# Altium PCB PCB1.PcbDoc
Units mm, origin at the board's own origin, x right, y up, seen from the top; angles counter-clockwise.
Board outline 61.29 x 63.12 mm, 2 copper layers (Top Layer, Bottom Layer); 38 components, 44 nets, 154 pads, 34 vias.
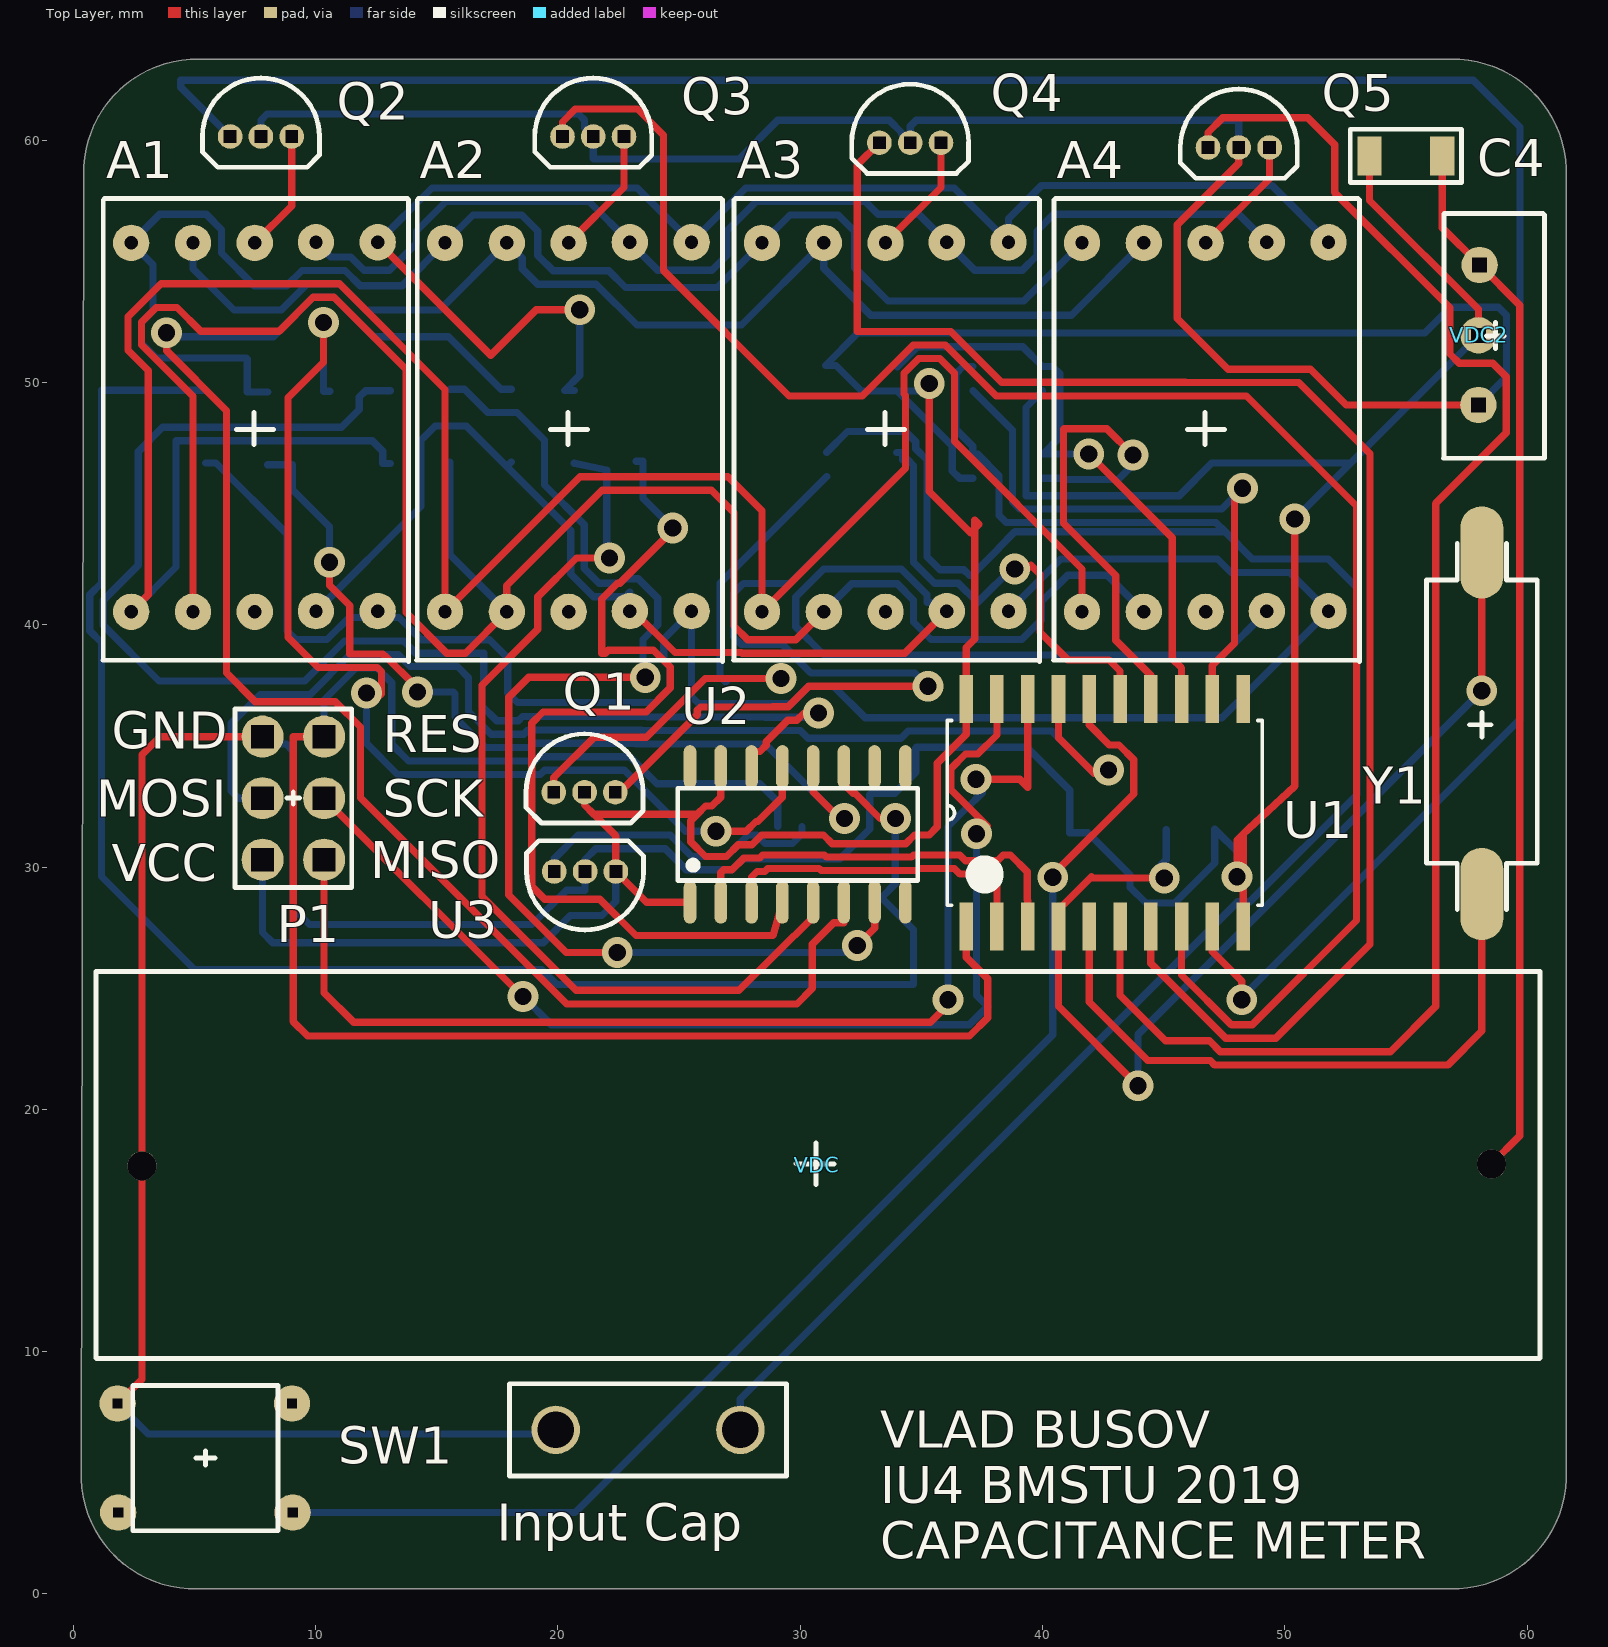
[diagram p0: Top Layer view]
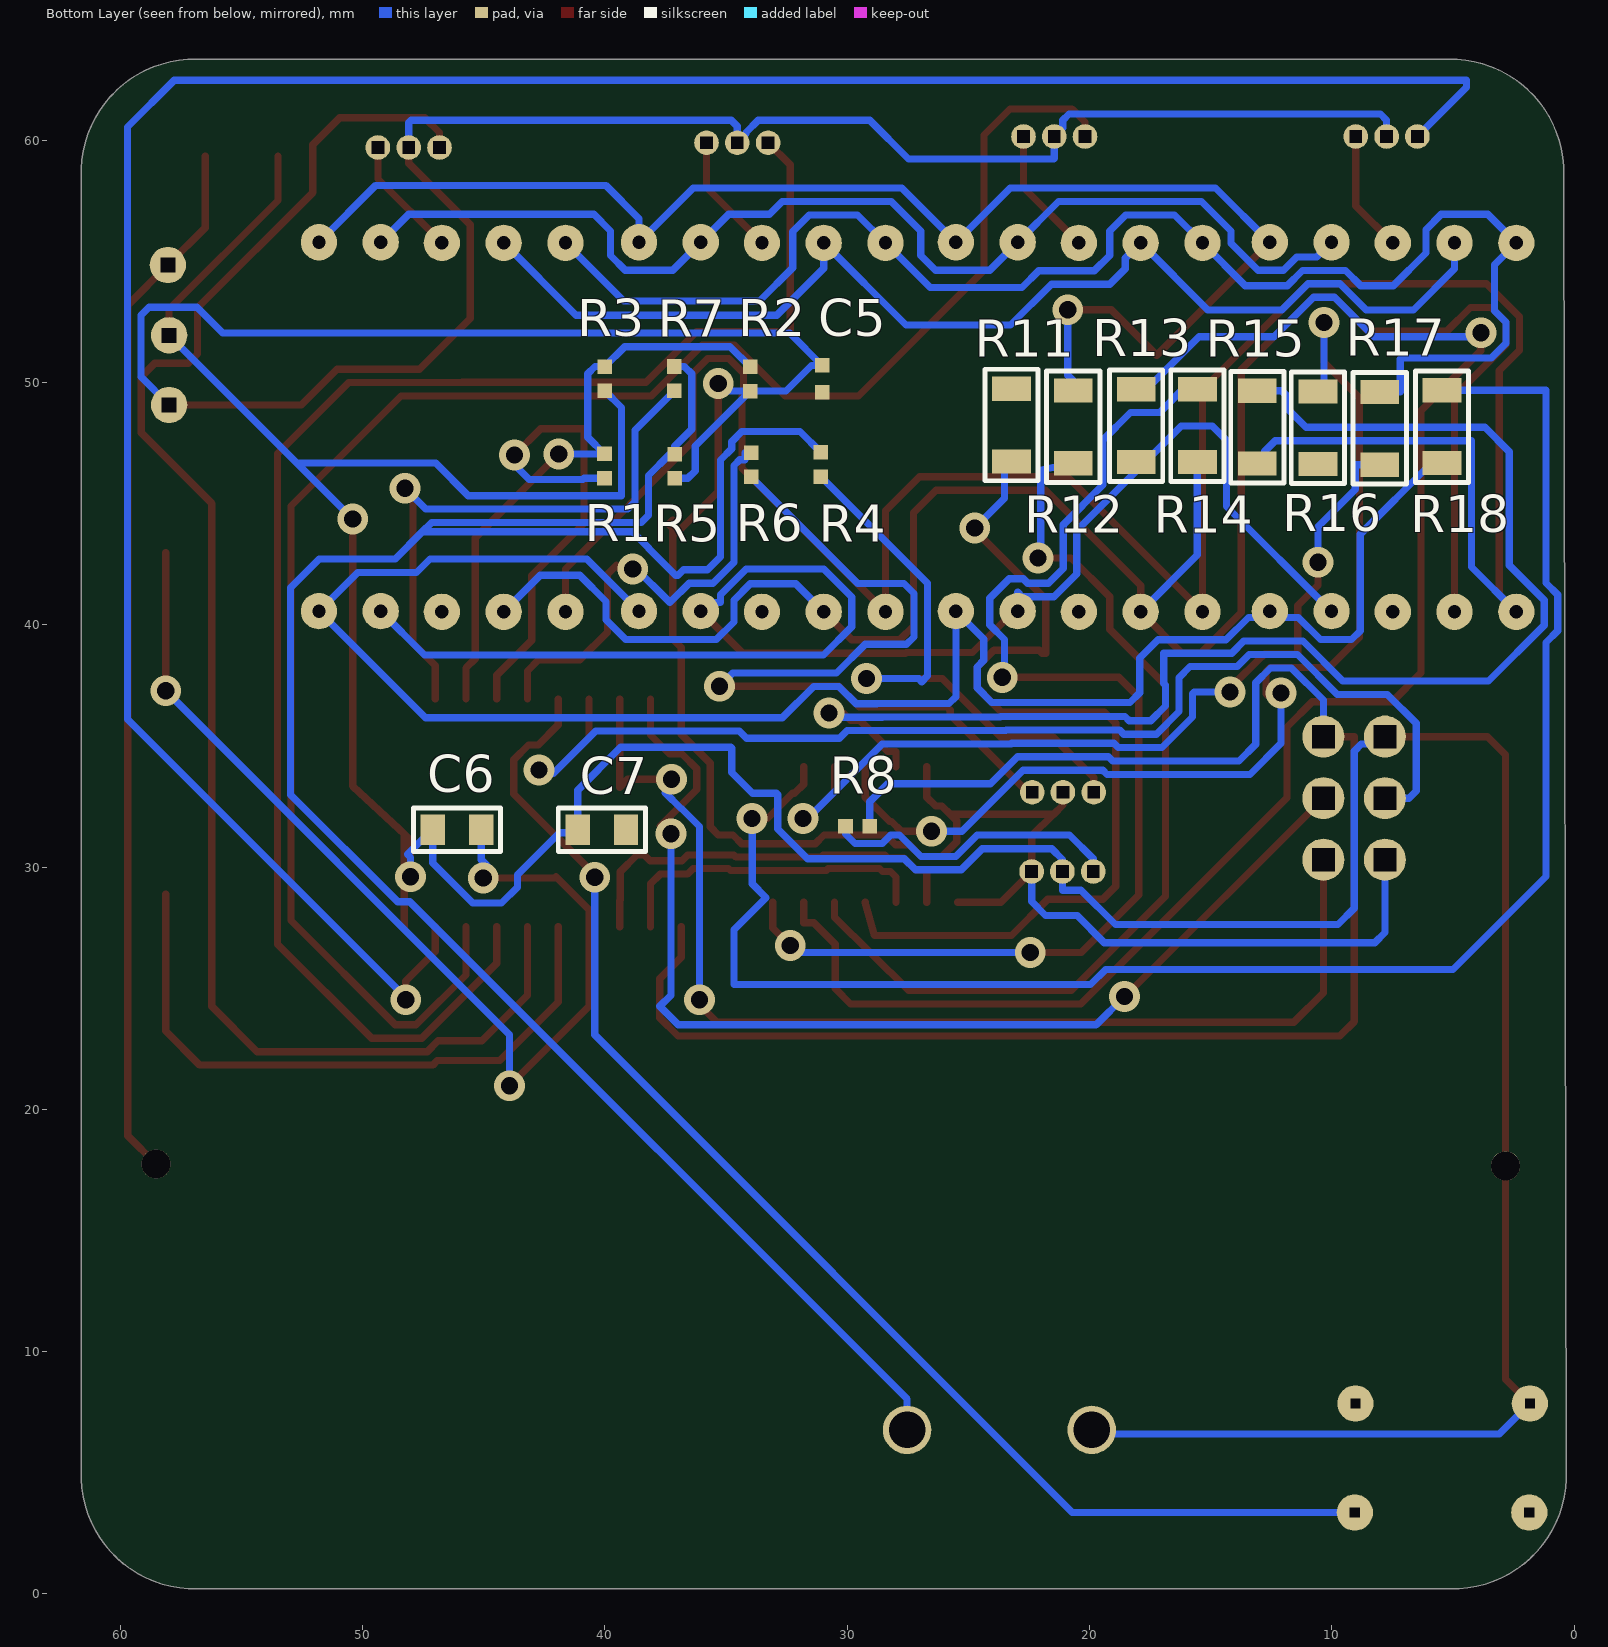
[diagram p1: Bottom Layer view, seen from below]
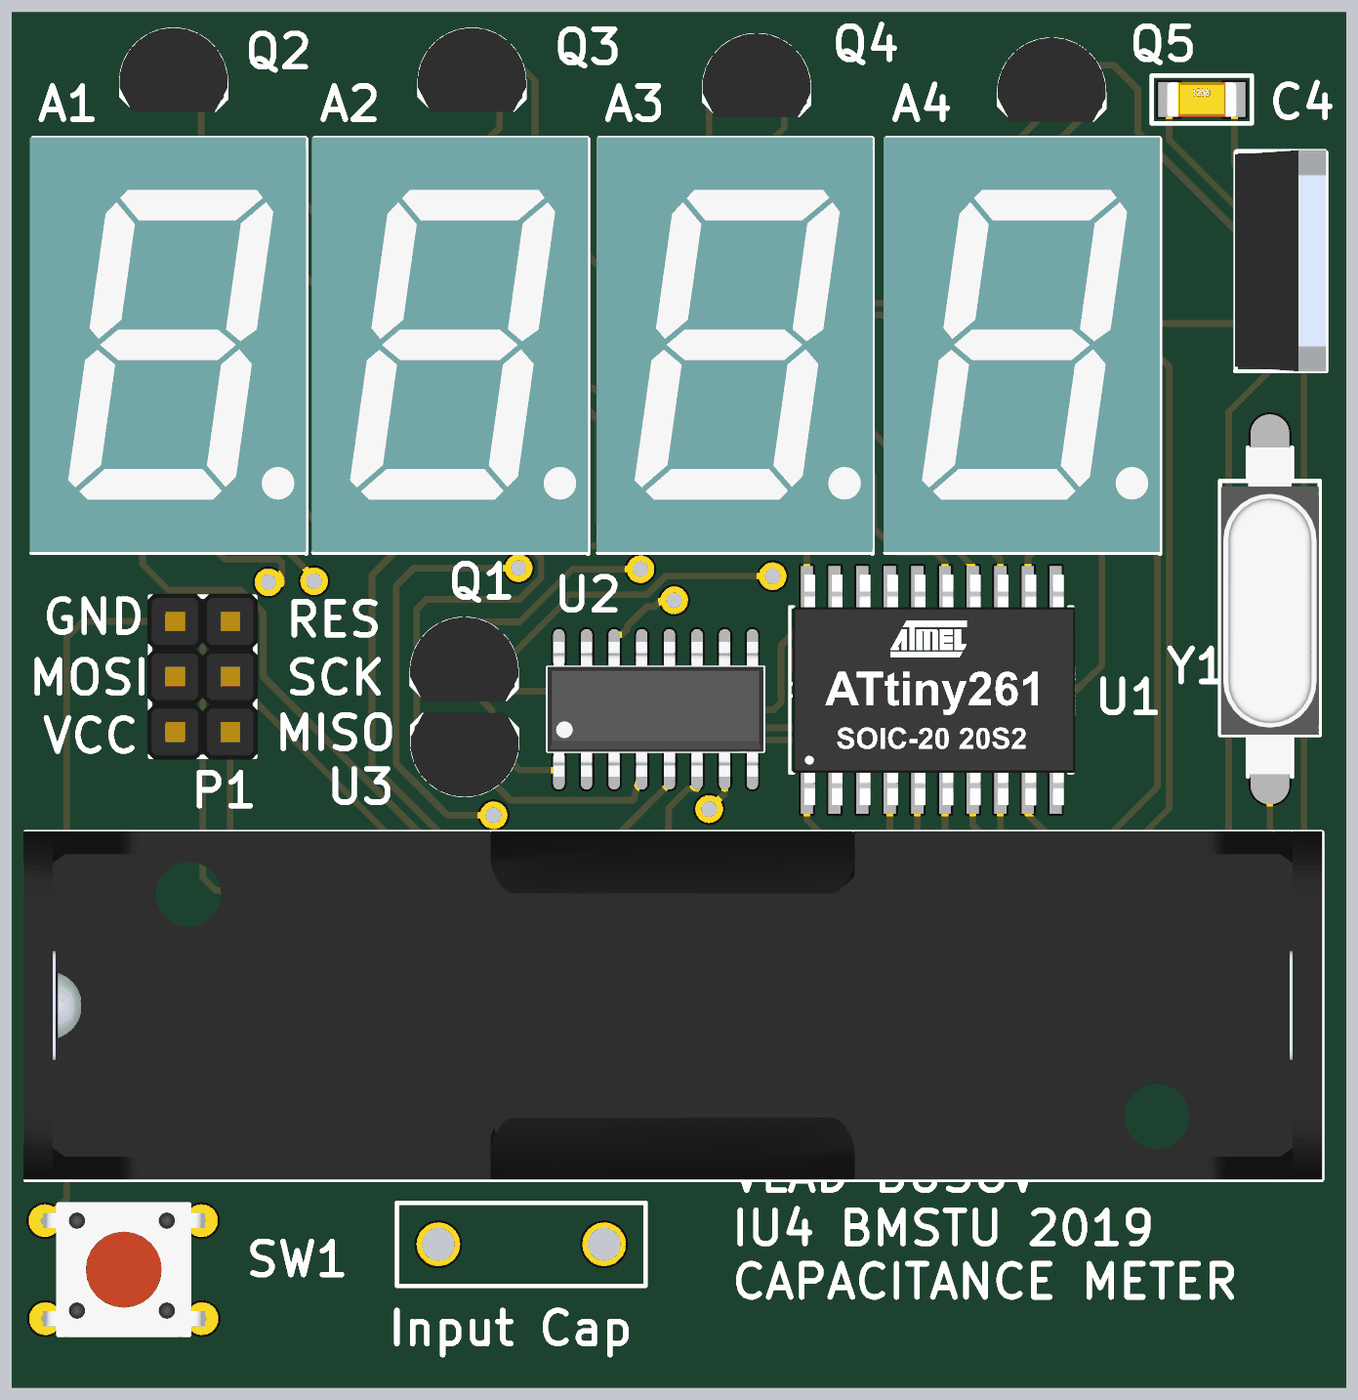
[diagram p2: 3D render of the assembled board from above, using the file's embedded part models]
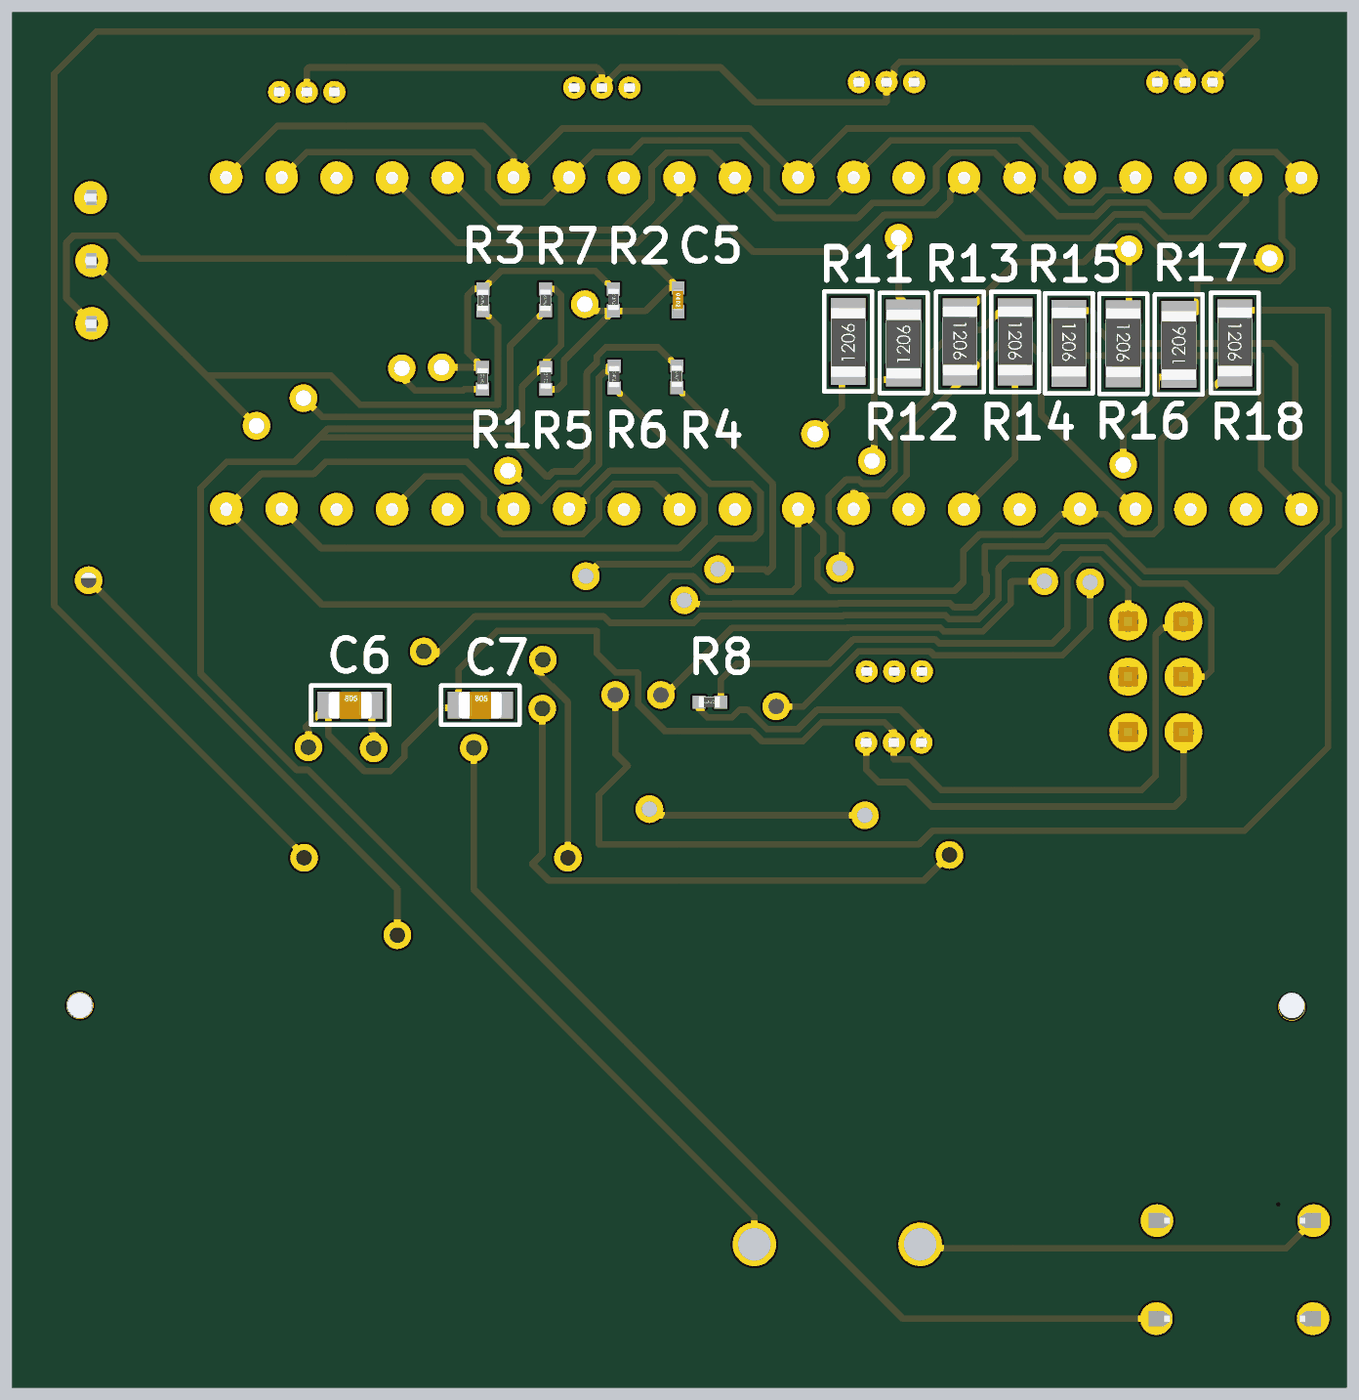
[diagram p3: 3D render of the assembled board from below, using the file's embedded part models]

## Layer stack, top to bottom
Top Solder: solder mask 0.0102, Solder Resist, Dk 3.5
Top Layer: signal copper 0.0356
Dielectric 1: dielectric 0.32, FR-4, Dk 4.8
Bottom Layer: signal copper 0.0356
Bottom Solder: solder mask 0.0102, Solder Resist, Dk 3.5

## Board outline
0.328,4.741 cw(c0.427,4.758) 0.327,4.758 0.429,58.777 cw(c0.527,58.792) 0.428,58.795 cw(c5.099,58.665) 0.429,58.832 0.429,58.9 cw(c0.529,58.9) 0.433,58.929 cw(c5.099,58.665) 5.195,63.337 cw(c5.2,63.237) 5.2,63.337 56.854,63.337 cw(c56.942,58.665) 61.613,58.818 cw(c61.514,58.8) 61.614,58.8 61.614,4.758 cw(c61.514,4.758) 61.613,4.741 cw(c56.942,4.885) 56.826,0.213 cw(c56.815,0.313) 56.815,0.213 5.126,0.213 cw(c5.126,0.313) 5.115,0.213 cw(c4.999,4.885)

## Design rules (kind name [scope] priority, off if disabled: settings)
Clearance [All] p1: gap=0.254 ignorepadtopadclearanceinfootprint=FALSE except(0: Arc-Hole Track-Hole SMDPad-Hole THPad-Hole Via-Hole Fill-Hole Poly-Hole Region-Hole Text-Hole)
PolygonConnect [All] p1: connectstyle=Relief reliefconductorwidth=0.254 reliefentries=4 polygonreliefangle="90 Angle" airgapwidth=0.254
RoutingVias [All] p1: holewidth=0.711 width=1.27 viastyle="Through Hole" minholewidth=0.711 minwidth=1.27 maxholewidth=0.711 maxwidth=1.27
SolderMaskExpansion [All] p1: expansion=0.102
Width [All] p1: maxlimit=0.3 minlimit=0.254 preferedwidth=0.3
30 further rules are at their usual default settings.

## Components (designator, comment, footprint, x,y, rotation, side; value= is the part's Value field where it differs from the comment)
A1 "7segment" 7segment 7.487,48.084 r0 top
A2 "7segment" 7segment 20.441,48.084 r0 top
A3 "7segment" 7segment 33.522,48.084 r0 top
A4 "7segment" 7segment 46.73,48.084 r0 top
C4 "0.33мкФ" CH1206C 54.998,59.348 r0 top
C5 "0.1мкФ" CH0402C 31.039,50.149 r270 bottom
C6 "33p" CH0805C 46.108,31.537 r180 bottom
C7 "33p" CH0805C 40.127,31.537 r180 bottom
"Input Cap" "Cap" RAD-0.3 23.72,6.771 r180 top value=megure (schematic designator Cvar)
P1 "CN6BOX" CN6BOX 9.079,32.841 r0 top
Q1 "A1048" PST600C 21.099,33.593 r0 top
Q2 "rn2205" PST600C 7.741,60.657 r0 top
Q3 "RN2205" PST600C 21.457,60.657 r0 top
Q4 "rn2205" PST600C 34.538,60.403 r0 top
Q5 "rn2205" PST600C 48.1,60.203 r0 top
R1 "10кОм" CH0402R 40.019,46.549 r90 bottom
R2 "39кОм" CH0402R 34.006,50.144 r270 bottom
R3 "39кОм" CH0402R 40.003,50.154 r90 bottom
R4 "3,3кОм" CH0402R 31.096,46.616 r270 bottom
R5 "3.3МОм" CH0402R 37.116,46.54 r270 bottom
R6 "10кОм" CH0402R 33.972,46.603 r270 bottom
R7 "100" CH0402R 37.132,50.157 r90 bottom
R8 "1.5кОм" CH0402R 29.572,31.676 r180 bottom
R11 "680" CH1206R 23.221,48.241 r90 bottom
R12 "680" CH1206R 20.673,48.166 r90 bottom
R13 "680" CH1206R 18.077,48.217 r270 bottom
R14 "680" CH1206R 15.55,48.217 r270 bottom
R15 "680" CH1206R 13.075,48.155 r270 bottom
R16 "680" CH1206R 10.577,48.13 r270 bottom
R17 "680" CH1206R 8.023,48.103 r90 bottom
R18 "680" CH1206R 5.454,48.172 r270 bottom
SW1 "Switch" SWITCH 5.452,5.608 r0 top
U1 "AT90S2313" AT90S2313 42.183,32.234 r90 top
U2 "HC4049" HC4049 29.896,31.472 r90 top
U3 "PST600C" PST600C 21.121,29.307 r180 top
VDC "BatteryAA" Battery 30.68,17.743 r180 top
VDC2 "L7805ABV" 7805 58.689,51.945 r270 top
Y1 "HC49S" HC49S 58.131,35.871 r90 top

## Footprints (in the part's own frame and the unit in brackets; to place one, negate y for a bottom-side part, rotate by r counter-clockwise, add the part's x,y. Pads: shape width x height; smd on the part's side, far side on the other; paste and mask are expansions set on the pad)
7segment [mm]
  round 1.5 hole 0.55: 1(-5.1,-7.55) 2(-2.55,-7.55) 3(0,-7.55) 4(2.525,-7.525) 5(5.075,-7.525) 6(5.075,7.7) 7(2.525,7.7) 8(0,7.675) 9(-2.55,7.675) 10(-5.1,7.675)
  silkscreen extent -6.28,-9.6 6.35,9.5, body extent -6.35,-9.52 6.35,9.53, height 8.1
7805 [mm]
  round 1.5 hole 0.6 square: 1(-2.9,-0.65) 2(0,-0.7) 3(2.875,-0.7)
  silkscreen extent -5.03,-2.15 5.07,2.03, body extent -5.08,-2.17 5.08,2.03, height 21.95
AT90S2313 [mil]
  rect 78x22 smd: 1(185,160) 2(185,110) 3(185,60) 4(185,10) 5(185,-40) 6(185,-90) 7(185,-140) 8(185,-190) 9(185,-240) 10(-185,-190) 11(-185,-140) 12(-185,-90) 13(-185,-40) 14(-185,110) 15(-185,160) 16(185,210) 17(-185,210) 18(-185,10) 19(-185,60) 20(-185,-240)
  silkscreen extent -150,-271 150,241, body extent -209,-276 209,236, height 105
Battery [mm]
  round 1.2 hole 1.2: 1(-27.85,0) 2(27.85,0.075)
  silkscreen extent -29.85,-7.95 29.75,8.02, body extent -29.85,-8 29.85,8, height 13.9
CH0402C [mm]
  rect 0.6x0.6 smd: 1(-0.55,0) 2(0.55,0)
  body extent -0.51,-0.25 0.51,0.25, height 0.51
CH0402R [mm]
  rect 0.6x0.6 smd: 1(-0.5,0) 2(0.5,0)
  body extent -0.52,-0.25 0.48,0.25, height 0.34
CH0805C [mm] "Chip Capacitor, 2-Leads, Body 2,00x1,20mm, IPC Medium Density"
  rect 1x1.25 smd: 1(-1,0) 2(1,0)
  silkscreen extent -1.8,-0.9 1.8,0.9, body extent -1,-0.62 1,0.63, height 0.78
CH1206C [mm] "Non polar chip capacitor, size 1206"
  rect 1x1.6 smd: 1(-1.5,0) 2(1.5,0)
  silkscreen extent -2.3,-1.1 2.3,1.1, body extent -1.6,-0.8 1.6,0.8, height 1
CH1206R [mm] "Chip Resistor, 2-Leads, Body 3,0x1,5mm, IPC Low Density"
  rect 1x1.6 smd: 1(-1.5,0) 2(1.5,0)
  silkscreen extent -2.3,-1.1 2.3,1.1, body extent -1.65,-0.8 1.55,0.8, height 0.47
CN6BOX [mil]
  oval 68.06x68.48 hole 37 square: 1(50,-100) 2(-50,-100) 3(50,0) 4(-50,0) 5(50,100) 6(-50,100)
  silkscreen extent -95,-145 95,145, body extent -100,-150 100,150, height 333
HC49S [mil]
  oval 150x70 smd: 1(-275,0) 2(280,0)
  silkscreen extent -300,-90 295,90, body extent -295,-89 295,89, height 201
HC4049 [mil]
  oval 70.06x20.48 smd: 1(-115,25) 2(-115,-25) 3(-115,-75) 4(-115,-125) 5(105,75) 6(105,25) 7(105,-25) 8(105,-75) 9(-115,125) 10(-115,75) 11(105,125) 12(-115,175) 13(105,-175) 14(105,-125) 15(105,175) 16(-115,-175)
  silkscreen extent -80,-195 70,195, body extent -127,-195 117,195, height 67
PST600C [mil]
  round 40 hole 20 square: 1(-50,-20) 2(0,-20) 3(50,-20)
  silkscreen extent -95,-70 95,75, body extent -98,-74 98,78, height 335
RAD-0.3 [mm] "Radial Cap, Thru-Hole; 2 Leads; 0.3 in Pin Spacing"
  round 2 hole 1.5: 1(-3.81,0) 2(3.81,0)
  silkscreen extent -5.71,-1.91 5.72,1.9
SWITCH [mm]
  round 1.5 hole 0.4 square: 1(-3.625,2.25) 2(3.6,-2.25) ""(-3.6,-2.25) ""(3.575,2.25)
  oval 1.5x0 all layers, no hole: 8(-2,3)
  silkscreen extent -3,-3 3,3, body extent -3.95,-3.1 3.95,3.1, height 7.6

## Part data
C4 C5 C6 C7: library part Capacitor
"Input Cap": "Capacitor", LatestRevisionDate=17-Jul-2002, LatestRevisionNote="Re-released for DXP Platform.", PackageDescription="Radial Cap, Thru-Hole; 2 Leads; 0.3 in Pin Spacing", PackageReference=RAD-0.3, Published=8-Jun-2000, Publisher="Altium Limited"
Q3: library part rn2205, "rn2205"
R1 R2 R3 R4 R5 R6 R7 R8 R11 R12 R13 R14 R15 R16 R17 R18: library part Resistor
VDC2: library part 7805, "7805"

## Via types
v1: diameter 1.27, hole 0.711, Top Layer to Bottom Layer, 34 vias

## Nets (pads, with @x,y where several pads share a name; then routed paths per layer and width w, separated by ;. In a path a pad name is that pad's centre, name@x,y a point inside that pad or via, vN(x,y) a via of type N, cw(c..) or ccw(c..) an arc to the next point about the centre after c; other vN are vias at no path point)
GND: "Input Cap.2" C4.1 C6.1 C7.1 P1.6 R3.1 SW1.1 U1.20 U3.2 VDC2.2 VDC.2 | length 170.3
  Top Layer w0.3: SW1.1 2.83,8.861 VDC.2 2.83,34.636 3.575,35.381 P1.6 ; v1(48.025,29.6) 48.025,31.106 48.279,31.36 ; U1.20 48.279,31.36 ; v1(50.409,44.365) 50.409,33.342 48.489,31.556 48.279,31.36 ; C4.1 53.498,57.507 57.989,53.016 VDC2.2
  Bottom Layer w0.3: SW1.1 3.09,6.595 19.734,6.595 19.91,6.771 ; P1.6 7.809,35.076 8.782,35.076 9.079,34.779 9.079,28.294 9.747,27.626 18.933,27.626 20.35,29.043 21.121,29.043 U3.2 21.121,30.313 21.558,30.75 24.426,30.75 25.295,29.882 27.185,29.882 27.647,30.344 31.638,30.344 32.866,31.571 32.866,32.985 32.921,33.041 33.907,33.041 34.769,33.902 34.769,34.916 34.794,34.941 39.356,34.941 41.127,33.171 C7.1 41.127,31.411 41.878,31.411 43.611,29.678 43.611,29.17 44.27,28.511 45.455,28.511 47.108,30.164 C6.1 47.108,31.563 48.15,30.521 48.025,30.396 v1(48.025,29.6) ; R3.1 39.315,48.966 39.315,45.328 45.641,45.328 46.987,46.674 52.718,46.674 ; v1(50.409,44.365) 52.718,46.674 ; VDC2.2 52.718,46.674
NetA1_1: A1.1 A2.1 A3.1 A4.1 R15.2 | length 101.9
  Top Layer w0.3: A1.1 3.092,41.239 3.092,50.494 2.257,51.329 2.257,52.71 3.615,54.068 10.985,54.068 15.341,49.712 A2.1 20.909,46.102 27.018,46.102 28.422,44.698 A3.1 34.346,46.458 34.346,49.46 34.286,49.52 34.286,50.38 34.895,50.989 35.755,50.989 36.364,50.38 36.364,47.568 41.63,42.302 A4.1
  Bottom Layer w0.3: A1.1 4.235,42.382 4.235,47.591 12.338,47.591 12.77,47.159 12.77,46.655 R15.2
NetA1_2: A1.2 A2.2 A3.2 A4.2 R14.2 | length 87.9
  Top Layer w0.3: A1.2 4.937,49.433 2.811,51.559 2.811,52.48 3.42,53.089 4.28,53.089 5.258,52.112 8.492,52.112 9.895,53.514 10.755,53.514 13.735,50.534 13.735,40.504 15.411,38.828 16.185,38.828 A2.2 17.891,41.617 21.822,45.548 26.34,45.548 27.268,44.621 27.268,39.944 27.832,39.38 29.818,39.38 A3.2
  Bottom Layer w0.3: R14.2 15.55,42.875 A2.2 ; A3.2 32.126,41.688 34,41.688 34.676,41.012 34.676,40.112 35.401,39.386 39.141,39.386 39.961,40.206 39.961,40.96 41.04,42.039 42.675,42.039 A4.2
NetA1_4: A1.4 A2.4 A3.4 A4.4 R13.2 | length 67.1
  Top Layer w0.3: A2.4 23.122,40.559 24.83,38.851 27.576,38.851 27.601,38.826 34.314,38.826 A3.4
  Bottom Layer w0.3: A1.4 10.028,40.559 14.345,44.875 14.345,47.616 14.934,48.205 16.219,48.205 R13.2@17.892,46.532 ; R13.2 R13.2@17.892,46.532 ; A2.4 22.966,41.339 22.786,41.159 21.466,41.159 20.533,42.092 20.533,43.891 R13.2@17.892,46.532 ; A3.4 36.047,40.921 35.23,40.921 35.23,41.241 34.17,42.302 30.976,42.302 29.818,41.144 29.818,39.915 30.982,38.751 47.447,38.751 A4.4
NetA1_5: A1.5 A2.5 A3.5 A4.5 R18.2 | length 79
  Bottom Layer w0.3: R18.2 5.89,46.672 8.833,43.73 8.833,39.742 9.188,39.386 10.471,39.386 11.386,40.301 12.304,40.301 A1.5 12.82,40.301 13.444,40.301 14.365,39.38 17.173,39.38 17.926,38.626 17.926,37.196 18.334,36.788 24.032,36.788 24.64,37.396 24.64,38.257 24.365,38.532 24.365,39.408 A2.5 25.516,37.032 25.8,36.748 28.761,36.748 28.771,36.738 29.632,36.738 30.348,37.454 31.388,37.454 32.679,36.163 47.409,36.163 A4.5 50.208,42.157 47.781,42.157 47.223,42.714 40.752,42.714 A3.5
NetA1_6: A1.6 A2.6 A3.6 A4.6 R12.2 | length 60.5
  Top Layer w0.3: A1.6 17.225,51.121 19.106,53.003 v1(20.901,53.003)
  Bottom Layer w0.3: A1.6 14.799,58.021 23.279,58.021 A2.6 27.753,58.021 36.36,58.021 A3.6 38.597,56.76 39.969,58.132 49.457,58.132 A4.6 ; R12.2 20.27,49.666 20.9,50.296 20.901,50.297 v1(20.901,53.003)
NetA1_7: A1.7 A2.7 A3.7 A4.7 | length 47.4
  Bottom Layer w0.3: A1.7 10.62,55.176 11.444,55.176 11.993,54.626 13.049,54.626 14.167,55.744 14.167,56.252 15.382,57.467 21.283,57.467 A2.7 24.124,54.626 26.359,54.626 26.968,55.236 26.968,56.252 28.183,57.467 32.68,57.467 33.209,56.938 34.893,56.938 A3.7 37.205,54.626 39.16,54.626 39.77,55.236 39.77,56.252 40.456,56.938 48.101,56.938 A4.7
NetA1_8: A1.8 Q2.3 | length 5
  Top Layer w0.3: A1.8 9.011,57.283 Q2.3
NetA1_9: A1.9 A2.9 A3.9 A4.9 | length 49.2
  Bottom Layer w0.3: A1.9 4.937,54.685 6.633,52.989 8.586,52.989 9.665,54.068 10.985,54.068 12.064,52.989 15.121,52.989 A2.9 18.525,55.125 18.525,54.689 19.163,54.051 21.575,54.051 23.26,52.366 27.579,52.366 A3.9 30.972,54.712 32.912,52.772 41.193,52.772 A4.9
NetA1_10: A1.10 A2.10 A3.10 A4.10 R17.2 | length 61.2
  Bottom Layer w0.3: R17.2 7.176,49.603 7.176,50.97 7.135,51.011 3.42,51.011 2.811,51.62 2.811,52.48 3.287,52.956 3.287,54.859 A1.10 3.566,56.938 5.48,56.938 6.115,56.303 6.115,55.338 7.461,53.991 8.805,53.991 9.436,54.622 11.214,54.622 11.845,53.991 13.573,53.991 A2.10 16.495,56.913 18.51,56.913 19.171,56.252 19.171,55.236 19.802,54.605 22.101,54.605 22.791,53.915 26.578,53.915 A3.10 29.576,56.913 31.565,56.913 32.252,56.227 32.252,54.728 33.623,53.356 39.227,53.356 A4.10
NetA2_8: A2.8 Q3.3 | length 5.3
  Top Layer w0.3: A2.8 22.727,58.045 Q3.3
NetA3_8: A3.8 Q4.3 | length 5.1
  Top Layer w0.3: A3.8 35.808,58.045 Q4.3
NetA4_8: A4.8 Q5.3 | length 5
  Top Layer w0.3: A4.8 49.37,58.399 Q5.3
NetC4_2: C4.2 VDC2.1 VDC.1 | length 43.4
  Top Layer w0.3: C4.2 56.498,56.386 VDC2.1 59.697,53.187 59.697,18.91 VDC.1
NetC6_2: C6.2 U1.19 Y1.2 | length 43.8
  Top Layer w0.3: v1(43.936,20.971) 40.659,24.248 U1.19 40.659,28.236 42.023,29.6 42.073,29.55 v1(45.025,29.55) ; v1(58.131,37.273) Y1.2
  Bottom Layer w0.3: v1(43.936,20.971) 43.936,23.077 v1(58.131,37.273) ; v1(45.025,29.55) 44.939,29.55 44.65,29.839 45.108,30.297 C6.2
NetCvar_1: "Input Cap.1" R4.1 R5.1 R7.2 | length 91.7
  Bottom Layer w0.3: 27.53,6.771 27.53,8.04 48.051,28.561 48.555,28.561 52.978,32.984 52.978,41.52 51.787,42.711 48.66,42.711 47.539,43.831 ; R4.1 31.952,47.972 34.351,47.972 34.771,47.552 34.771,47.259 35.23,46.8 35.23,42.808 35.771,42.267 36.754,42.267 36.993,42.029 37.073,42.029 38.191,43.147 38.191,43.163 38.859,43.831 47.539,43.831 ; R7.2 36.722,50.657 36.417,50.352 36.417,48.065 37.116,47.367 R5.1 37.323,47.04 38.206,46.158 38.206,44.514 38.5,44.22 47.151,44.22 47.539,43.831
NetP1_1: P1.1 U1.2 | length 48.3
  Top Layer w0.3: P1.1 10.349,24.815 11.576,23.588 35.376,23.588 36.313,24.525 v1(36.1,24.525) ; v1(37.25,33.625) 39.054,33.625 39.389,33.29 U1.2
  Bottom Layer w0.3: v1(36.1,24.525) 36.1,31.669 36.845,32.414 36.862,32.414 37.509,33.062 37.25,33.321 v1(37.25,33.625)
NetP1_3: P1.3 U1.1 | length 46.5
  Top Layer w0.3: P1.3 18.536,24.654 v1(18.561,24.654) ; v1(37.275,31.375) 37.303,31.375 37.35,31.328 37.714,31.692 36.82,32.586 36.211,33.195 36.211,34.055 36.82,34.664 37.332,34.664 38.119,35.451 U1.1
  Bottom Layer w0.3: v1(18.561,24.654) 19.729,23.486 36.976,23.486 37.738,24.248 37.275,24.711 v1(37.275,31.375)
NetP1_4: P1.4 U1.3 | length 49.2
  Top Layer w0.3: U1.3 40.659,35.335 42.125,33.869 42.256,34 v1(42.725,34)
  Bottom Layer w0.3: P1.4 6.818,32.841 6.521,33.138 6.521,35.932 7.713,37.123 9.775,37.123 11.422,38.77 13.408,38.77 13.906,38.272 15.852,38.272 16.308,37.816 16.308,36.417 17.241,35.484 18.588,35.484 18.763,35.659 23.435,35.659 23.464,35.63 30.004,35.63 30.321,35.313 34.161,35.313 34.457,35.609 40.385,35.609 42.125,33.869 42.256,34 v1(42.725,34)
NetP1_5: P1.5 R8.2 U1.17 | length 72.1
  Top Layer w0.3: P1.5 9.081,35.381 9.081,23.619 9.671,23.029 36.984,23.029 37.738,23.783 37.738,25.391 36.849,26.28 U1.17
  Bottom Layer w0.3: P1.5 10.349,36.895 11.67,38.216 12.531,38.216 13.14,37.607 13.14,35.07 13.834,34.376 19.047,34.376 19.222,34.551 22.976,34.551 24.089,33.438 28.329,33.438 29.072,32.695 R8.2
NetQ1_1: Q1.1 R4.2 | length 24.4
  Top Layer w0.3: Q1.1 19.829,33.691 21.495,35.357 23.659,35.357 26.079,37.777 v1(29.201,37.777)
  Bottom Layer w0.3: v1(29.201,37.777) 27.054,37.777 26.927,37.65 26.689,37.888 26.689,41.709 R4.2
NetQ1_3: Q1.3 R6.2 | length 34.2
  Top Layer w0.3: Q1.3 22.546,33.085 25.748,36.287 25.748,36.464 25.885,36.601 28.848,36.601 28.858,36.611 29.505,36.611 30.35,37.456 v1(35.274,37.456)
  Bottom Layer w0.3: R6.2 29.567,41.698 27.654,41.698 27.248,41.291 27.248,39.496 27.553,39.191 29.257,39.191 30.44,38.008 34.723,38.008 v1(35.274,37.456)
NetQ2_1: Q2.1 U1.10 | length 103.5
  Top Layer w0.3: U1.10 47.009,26.509 48.225,25.293 v1(48.225,24.525)
  Bottom Layer w0.3: Q2.1 4.439,62.181 4.439,62.475 57.779,62.475 59.709,60.545 59.709,36.101 48.225,24.617 v1(48.225,24.525)
NetQ3_1: Q3.1 U1.11 | length 74.4
  Top Layer w0.3: Q3.1 20.187,60.749 20.72,61.282 23.285,61.282 24.352,60.214 24.352,54.626 29.539,49.44 32.562,49.44 34.665,51.543 35.985,51.543 38.088,49.44 48.422,49.44 52.959,44.903 52.959,27.79 48.655,23.486 47.795,23.486 45.739,25.542 U1.11
NetQ4_1: Q4.1 U1.12 | length 65.1
  Top Layer w0.3: Q4.1 32.353,58.98 32.353,52.112 32.368,52.097 36.214,52.097 38.307,50.004 45.891,50.004 45.901,49.994 50.575,49.994 53.513,47.056 53.513,26.815 49.63,22.932 47.565,22.932 44.469,26.028 U1.12
NetQ5_1: Q5.1 U1.13 | length 64.7
  Top Layer w0.3: U1.13 43.199,24.705 45.079,22.826 46.888,22.826 47.336,22.378 54.359,22.378 56.229,24.248 56.229,45.007 59.143,47.921 59.143,50.232 58.584,50.791 57.194,50.791 56.813,51.172 56.813,53.083 52.064,57.833 52.064,59.808 50.946,60.926 47.44,60.926 46.83,60.316 Q5.1
NetR1_1: R1.1 U1.6 | length 20.3
  Top Layer w0.3: v1(43.732,47.006) 42.651,48.088 40.888,48.088 40.862,48.063 40.862,44.187 43.021,42.028 43.021,39.361 44.469,37.913 U1.6
  Bottom Layer w0.3: R1.1 40.862,46.049 40.921,45.99 43.123,45.99 43.732,46.6 v1(43.732,47.006)
NetR1_2: R1.2 R2.1 R3.2 U1.7 | length 24.7
  Top Layer w0.3: v1(41.904,47.049) 45.358,43.595 45.358,38.599 45.739,38.218 U1.7
  Bottom Layer w0.3: R2.1 34.839,51.477 39.18,51.477 R3.2 40.415,50.654 40.71,50.359 40.71,47.74 R1.2 v1(41.904,47.049)
NetR6_1: R6.1 U1.5 | length 19.5
  Top Layer w0.3: v1(38.852,42.302) 39.378,42.302 39.526,42.45 39.897,42.079 39.897,39.691 41.04,38.548 42.742,38.548 43.199,38.091 U1.5
  Bottom Layer w0.3: R6.1 34.217,47.103 34.217,46.807 34.439,46.807 34.676,46.57 34.676,42.579 35.555,41.699 35.569,41.713 36.525,41.713 37.313,40.925 37.331,40.925 38.833,42.427 38.852,42.408 v1(38.852,42.302)
NetR7_1: R7.1 U1.8 | length 24.4
  Top Layer w0.3: U1.8 47.009,38.32 47.923,39.234 47.923,45.305 v1(48.254,45.635)
  Bottom Layer w0.3: R7.1 38.76,48.029 38.76,45.076 39.062,44.774 47.393,44.774 v1(48.254,45.635)
NetR8_1: R8.1 U3.3 | length 12.5
  Bottom Layer w0.3: U3.3 19.851,30.344 20.828,31.321 24.639,31.321 25.524,30.436 26.955,30.436 27.841,31.321 28.201,31.321 28.55,30.972 29.684,30.972 30.072,31.36 R8.1
NetR11_1: R11.1 U2.1 | length 39.3
  Top Layer w0.3: v1(24.742,43.993) 24.742,43.899 22.556,41.713 22.462,41.713 21.812,41.063 21.812,38.827 21.954,38.827 22.075,38.949 23.948,38.949 24.64,38.257 24.64,37.396 23.64,36.396 19.381,36.396 18.917,35.932 18.917,29.201 19.45,28.667 21.727,28.667 23.225,27.169 28.88,27.169 U2.1
  Bottom Layer w0.3: R11.1 23.514,46.741 23.514,45.22 v1(24.742,43.993)
NetR12_1: R12.1 U2.2 | length 39.1
  Top Layer w0.3: v1(22.126,42.752) 20.768,42.752 19.171,41.155 19.171,39.816 16.862,37.507 16.862,28.792 20.745,24.908 27.47,24.908 30.531,27.921 U2.2
  Bottom Layer w0.3: R12.1 22.015,46.386 22.015,42.863 v1(22.126,42.752)
NetR13_1: R13.1 U2.3 | length 67.8
  Top Layer w0.3: v1(3.85,52.05) 3.85,51.303 6.318,48.835 6.318,38.015 7.512,36.821 10.812,36.821 11.855,35.778 11.855,32.859 20.364,24.35 29.864,24.35 30.499,24.985 30.499,26.813 31.388,27.702 31.801,27.702 U2.3
  Bottom Layer w0.3: v1(3.85,52.05) 4.017,51.883 8.264,51.883 9.895,53.514 10.755,53.514 12.386,51.883 15.481,51.883 17.647,49.717 R13.1
NetR14_1: R14.1 U2.4 | length 49.7
  Top Layer w0.3: v1(22.45,26.475) 20.347,26.475 17.974,28.848 17.974,37.004 18.797,37.827 v1(23.601,37.827) ; v1(32.355,26.763) 33.071,27.479 U2.4
  Bottom Layer w0.3: R14.1 16.148,49.717 17.106,48.759 18.307,48.759 19.45,47.616 19.45,45.762 21.087,44.125 21.087,42.322 21.696,41.713 22.556,41.713 22.737,41.893 23.319,41.893 24.124,41.088 24.124,39.996 23.514,39.386 23.514,37.914 v1(23.601,37.827) ; v1(22.45,26.475) 32.067,26.475 v1(32.355,26.763)
NetR15_1: R15.1 U2.5 | length 57.7
  Top Layer w0.3: U2.5 27.991,34.764 28.34,34.764 28.597,35.02 28.597,35.17 29.484,36.057 29.86,36.057 30.155,36.352 v1(30.752,36.352)
  Bottom Layer w0.3: R15.1 12.066,49.655 11.805,49.394 11.805,48.881 11.068,48.145 3.677,48.145 2.675,47.143 2.675,42.454 1.233,41.012 1.233,39.976 3.531,37.677 9.546,37.677 11.192,39.324 13.638,39.324 14.135,38.826 16.943,38.826 16.943,37.589 16.862,37.507 16.862,36.646 17.471,36.038 18.358,36.038 18.533,36.213 23.665,36.213 23.684,36.194 28.532,36.194 28.542,36.184 30.584,36.184 v1(30.752,36.352)
NetR16_1: R16.1 U2.6 | length 45.6
  Top Layer w0.3: v1(10.325,52.475) 10.325,50.835 8.858,49.368 8.858,39.488 10.11,38.236 12.548,38.236 12.718,38.067 12.718,37.15 12.645,37.077 12.325,37.396 12.105,37.177 v1(12.101,37.177) ; v1(26.525,31.475) 27.776,31.475 28.177,31.875 28.252,31.875 29.261,32.884 U2.6
  Bottom Layer w0.3: v1(10.325,52.475) 10.325,49.637 10.331,49.63 R16.1 ; v1(12.101,37.177) 12.101,35.103 13.381,33.822 19.276,33.822 19.451,33.997 22.747,33.997 25.269,31.475 v1(26.525,31.475)
NetR17_1: R17.1 U2.7 | length 36.7
  Top Layer w0.3: v1(10.575,42.575) 10.575,41.628 11.408,40.795 11.408,38.79 12.778,38.79 12.868,38.7 12.885,38.7 14.11,37.475 14.11,37.243 14.126,37.227 v1(14.201,37.227) ; U2.7 30.531,33.106 31.635,32.002 v1(31.827,32.002)
  Bottom Layer w0.3: R17.1 9.036,46.603 9.036,45.584 10.575,44.045 v1(10.575,42.575) ; v1(14.201,37.227) 15.691,37.227 15.754,37.164 15.754,36.187 17.012,34.93 18.817,34.93 18.992,35.105 23.206,35.105 23.235,35.076 28.561,35.076 31.635,32.002 v1(31.827,32.002)
NetR18_1: R18.1 U2.8 | length 71.2
  Top Layer w0.3: U2.8 31.801,33.417 32.178,33.041 32.257,33.041 33.296,32.002 v1(33.927,32.002)
  Bottom Layer w0.3: R18.1 1.161,49.672 1.161,41.723 0.679,41.241 0.679,39.746 1.161,39.265 1.161,29.609 4.999,25.77 19.336,25.77 19.959,25.147 34.675,25.147 34.675,27.413 33.352,28.736 33.927,29.311 v1(33.927,32.002)
NetSW1_2: SW1.2 U1.4 | length 55.8
  Top Layer w0.3: v1(40.425,29.575) 40.425,29.678 43.764,33.017 43.764,34.43 43.155,35.039 42.756,35.039 41.929,35.866 U1.4
  Bottom Layer w0.3: SW1.2 20.709,3.358 40.425,23.074 v1(40.425,29.575)
NetU1_14: U1.14 U2.9 | length 17
  Top Layer w0.3: U2.9 26.721,29.761 26.842,29.882 27.185,29.882 27.67,30.367 28.311,30.367 28.44,30.496 31.004,30.496 31.092,30.409 34.586,30.409 34.674,30.496 36.584,30.496 36.818,30.263 38.142,30.263 38.376,30.496 38.678,30.496 39.366,29.808 39.366,28.642 39.389,28.619 U1.14
NetU1_15: U1.15 U2.10 | length 13.4
  Top Layer w0.3: U2.10 27.991,29.589 28.215,29.813 28.54,29.813 28.665,29.938 30.779,29.938 30.862,29.855 34.816,29.855 34.899,29.938 36.36,29.938 36.59,29.707 37.719,29.707 38.119,29.307 U1.15
NetU1_18: U1.18 Y1.1 | length 26.6
  Top Layer w0.3: U1.18 41.929,24.426 44.344,22.01 46.92,22.01 47.106,21.824 56.723,21.824 58.131,23.232 Y1.1
VCC: C5.1 P1.2 Q1.2 Q2.2 Q3.2 Q4.2 Q5.2 R2.2 R5.2 U1.16 U2.11 U2.12 U3.1 VDC2.3 | length 180.1
  Top Layer w0.3: Q1.2 21.099,32.556 ; U2.12 23.655,28.551 U3.1 22.391,31.284 21.488,32.173 ; U2.11 26.721,32.884 ; v1(35.325,49.95) 35.325,45.497 37.027,43.795 37.375,44.144 37.205,44.314 37.205,39.412 36.849,39.056 U1.16 36.849,35.477 35.657,34.285 35.657,31.656 35.322,31.321 34.716,31.321 34.357,30.963 31.321,30.963 30.963,31.321 28.406,31.321 28.006,30.921 27.44,30.921 26.955,30.436 26.095,30.436 25.486,31.045 25.486,31.905 26.095,32.514 ; Q5.2 48.1,59.046 45.561,56.507 45.561,52.642 47.655,50.548 51.061,50.548 52.539,49.07 VDC2.3 ; 21.099,32.556 21.482,32.173 21.488,32.173 ; 21.099,32.556 21.488,32.173 ; 21.488,32.173 25.753,32.173 26.095,32.514 ; 26.095,32.514 26.351,32.514 ; 26.095,32.514 26.351,32.514 ; 26.351,32.514 26.721,32.884 ; 26.351,32.514 26.721,32.884
  Bottom Layer w0.3: Q2.2 7.741,60.824 7.995,61.078 20.847,61.078 21.101,60.824 21.101,60.505 Q3.2 21.457,59.249 21.482,59.224 27.476,59.224 29.077,60.824 33.674,60.824 34.182,60.316 34.182,60.251 Q4.2 34.538,60.57 34.792,60.824 47.998,60.824 48.1,60.722 Q5.2 ; P1.2 7.809,27.296 8.226,26.879 19.39,26.879 20.513,28.002 21.818,28.002 22.391,28.574 U3.1 ; v1(35.325,49.95) 35.019,49.644 R2.2 ; R5.2 36.578,46.04 36.272,46.346 36.272,47.378 R2.2 ; VDC2.3 59.15,50.231 59.15,52.772 58.82,53.102 56.839,53.102 55.772,52.036 32.376,52.036 C5.1 31.476,50.699 32.531,49.644 R2.2
pads on no net: A1.3 A2.3 A3.3 A4.3 C5.2 C7.2 R11.2 R16.2 SW1. SW1.8 U1.9 U2.13 U2.14 U2.15 U2.16

## Silkscreen, mask and mechanical layers (free items; w line width, h text height)
Top Overlay:
  text "GND" at 1.586,34.873 h1.52
  text "RES" at 12.762,34.746 h1.52
  text "MOSI" at 0.951,32.079 h1.52
  text "SCK" at 12.762,32.079 h1.52
  text "MISO" at 12.254,29.539 h1.52
  text "VCC" at 1.586,29.412 h1.52
  text "VLAD BUSOV / IU4 BMSTU 2019 / CAPACITANCE METER" at 33.306,1.451 h1.52
Mechanical 15:
  lines w0.198: 0.427,4.758 ccw(c4.999,4.885) 5.126,0.313 ; 0.527,58.792 cw(c5.099,58.665) 5.226,63.237 ; 56.815,63.237 cw(c56.942,58.665) 61.514,58.792 ; 56.824,0.313 ccw(c56.951,4.885) 61.523,4.758
  lines w0.2: 0.427,4.758 0.529,58.9 ; 5.126,0.313 57.15,0.313 56.875,0.313 ; 5.2,63.237 57.015,63.237 ; 61.514,4.725 61.514,58.8